# EAGLE board ControlModule (EAGLE 7.4.0)
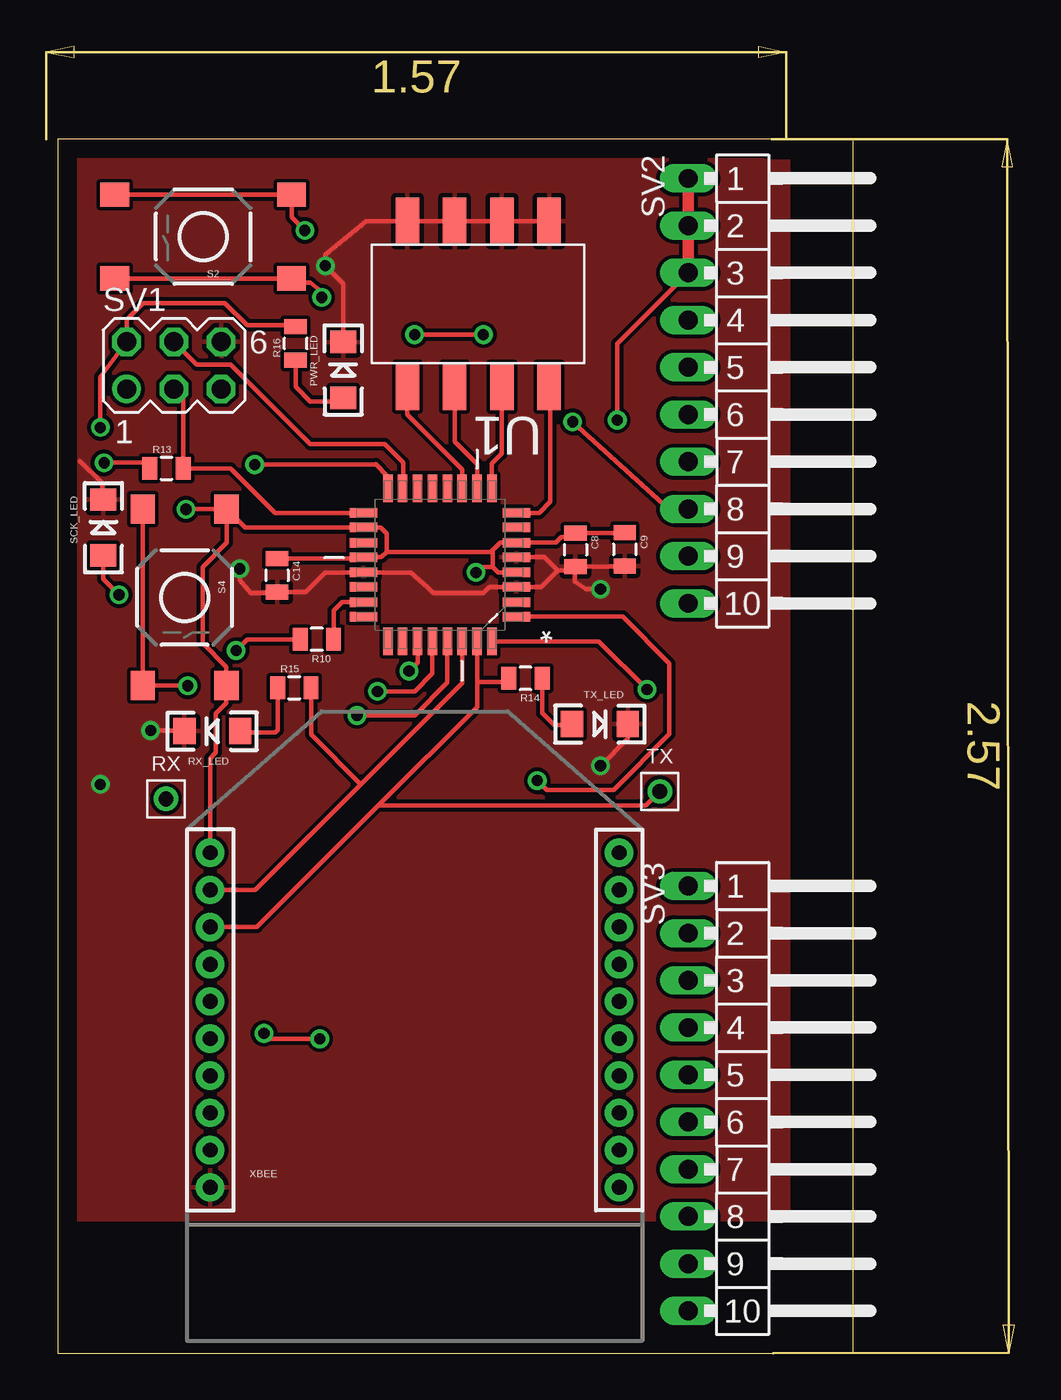
[diagram p0: board, top side]
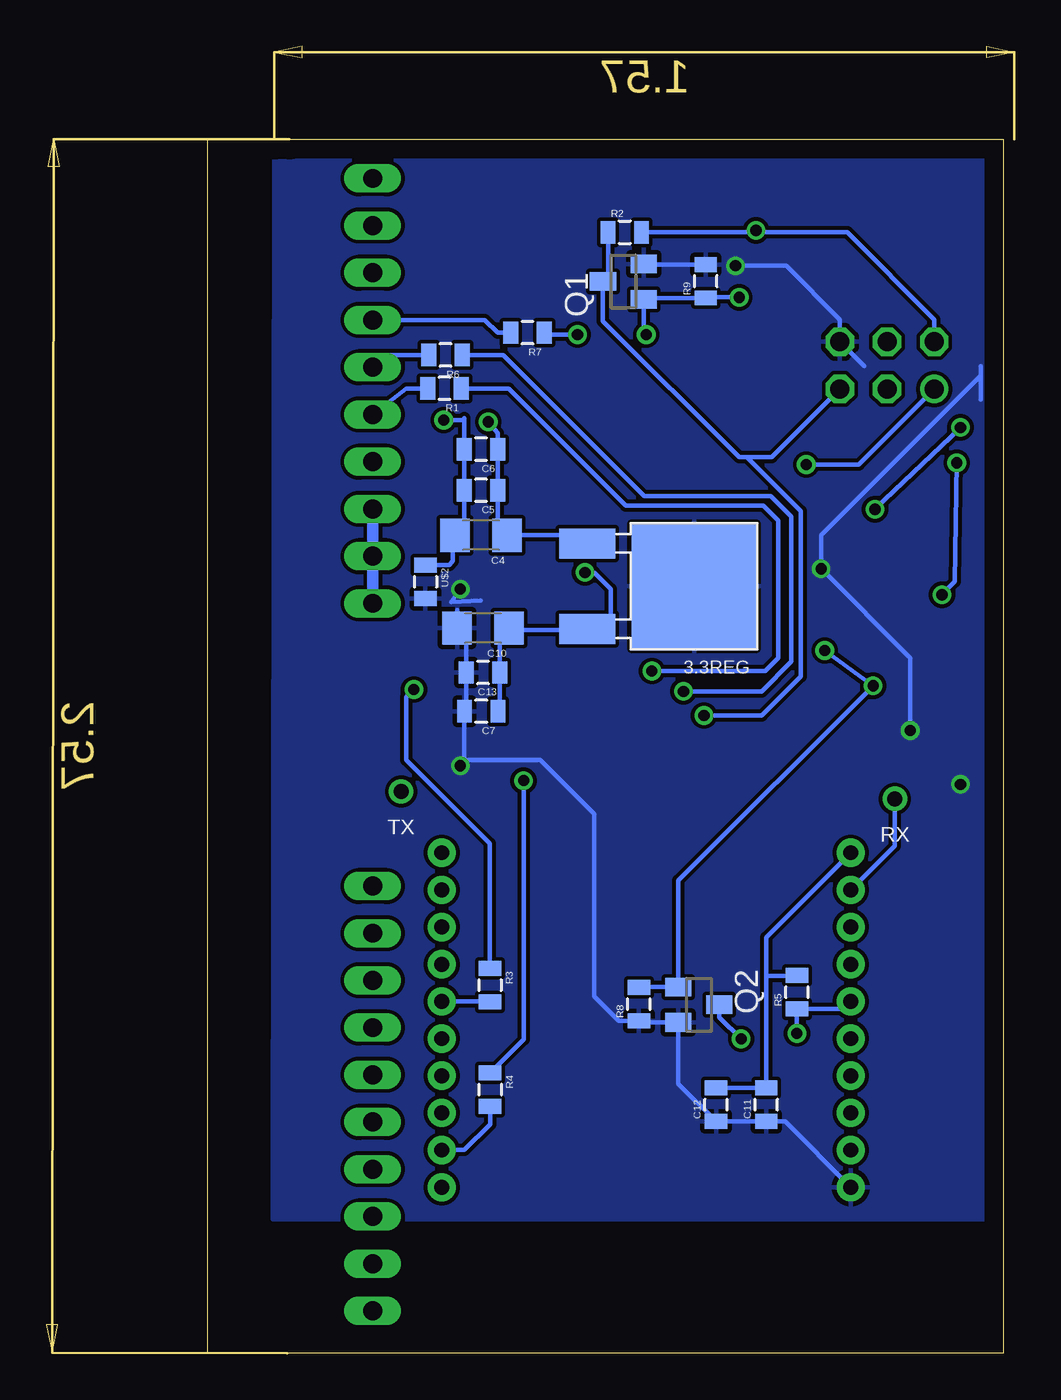
[diagram p1: board, bottom side, seen from below]

Size 42.8 x 65.3 mm. Coordinates in mm from the lower left corner, seen from the top.
Outline: 0,0 42.8,0 42.8,65.3 0,65.3 0,0
Copper layers (1*16): Top 0.035mm / dielectric 1.5mm / Bottom 0.035mm
Design rules "default": minimum track width 10mil, minimum drill 24mil, track to track 8mil, track to pad 8mil, pad to pad 8mil, via to via 8mil, smd to smd 8mil, copper to edge 40mil, drill to drill 8mil, minimum pad ring 10mil, minimum via ring 8mil, stop-mask expansion 4mil, vias tented up to drill 0mil, thermal gap 10mil

## Footprints (pad centres in the part's own frame; a part is rotated, then mirrored left to right if it is on the bottom)
DPAK = smd 6.7 x 6.7: DRAIN 0,0 | smd 3 x 1.6: GATE 5.75,-2.3; SOURCE 5.75,2.3
1206 = smd 1.6 x 1.8: 1 -1.4,0; 2 1.4,0
0805 = smd 0.8 x 1.2: 1 -0.9,0; 2 0.9,0
LED-1206 = smd 1.2 x 1.4: A -1.5,0; C 1.5,0
SOT23 = smd 1 x 1.4: 1 -0.95,-1.1; 2 0.95,-1.1; 3 0,1.1
TESTING_PT = drill 0.8: P$1 0,0
TACTILE-SWITCH-SMD = smd 1.55 x 1.3: 1 -4.75,2.25; 2 4.75,2.25; 3 -4.75,-2.25; 4 4.75,-2.25
MA03-2 = drill 1.016: 1 -2.54,-1.27 | drill 1.016 octagon: 2 -2.54,1.27; 3 0,-1.27; 4 0,1.27; 5 2.54,-1.27; 6 2.54,1.27
MA10-1W = drill 1.016 long: 1 -11.43,0; 2 -8.89,0; 3 -6.35,0; 4 -3.81,0; 5 -1.27,0; 6 1.27,0; 7 3.81,0; 8 6.35,0; 9 8.89,0; 10 11.43,0
QFP80P900X900X120-32N = smd 1.473 x 0.508: 1 -4.115,2.794; 2 -4.115,2.007; 3 -4.115,1.194; 4 -4.115,0.406; 5 -4.115,-0.406; 6 -4.115,-1.194; 7 -4.115,-2.007; 8 -4.115,-2.794; 17 4.115,-2.794; 18 4.115,-2.007; 19 4.115,-1.194; 20 4.115,-0.406; 21 4.115,0.406; 22 4.115,1.194; 23 4.115,2.007; 24 4.115,2.794 | smd 0.508 x 1.473: 9 -2.794,-4.115; 10 -2.007,-4.115; 11 -1.194,-4.115; 12 -0.406,-4.115; 13 0.406,-4.115; 14 1.194,-4.115; 15 2.007,-4.115; 16 2.794,-4.115; 25 2.794,4.115; 26 2.007,4.115; 27 1.194,4.115; 28 0.406,4.115; 29 -0.406,4.115; 30 -1.194,4.115; 31 -2.007,4.115; 32 -2.794,4.115
4-POS-DIP-SMD = smd 1.27 x 2.54: 1 -3.81,4.445; 2 -1.27,4.445; 3 1.27,4.445; 4 3.81,4.445; 5 3.81,-4.445; 6 1.27,-4.445; 7 -1.27,-4.445; 8 -3.81,-4.445
XBEE-1 = drill 0.8 pad 1.524: 1 -11,20; 2 -11,18; 3 -11,16; 4 -11,14; 5 -11,12; 6 -11,10; 7 -11,8; 8 -11,6; 9 -11,4; 10 -11,2; 11 11,2; 12 11,4; 13 11,6; 14 11,8; 15 11,10; 16 11,12; 17 11,14; 18 11,16; 19 11,18; 20 11,20

## Placement (x,y rotation side)
3.3REG  3.3REG1AREG  [DPAK]  16.63,41.26 180 bottom
C4  47uF  [1206]  28.09,44.01 180 bottom
C5  1uF  [0805]  28.09,46.42 180 bottom
C6  0.01uF  [0805]  28.09,48.63 180 bottom
C7  0.01uF  [0805]  28.08,34.53 180 bottom
C8  10uF  [0805]  27.85,43.22 270 top
C9  0.1uF  [0805]  30.5,43.24 270 top
C10  47uF  [1206]  27.98,39.01 180 bottom
C11  0.01uF  [0805]  12.75,13.36 90 bottom
C12  1uF  [0805]  15.45,13.36 90 bottom
C13  1uF  [0805]  27.98,36.62 180 bottom
C14  0.1uF  [0805]  11.8,41.84 270 top
FRAME1  FRAME-LETTER  [CREATIVE_COMMONS]  -78.74,50.8 0 top  (outside the outline)
PWR_LED  [LED-1206]  15.36,52.9 90 top
Q1  BSS123  [SOT23]  20.43,57.65 90 bottom
Q2  BSS123  [SOT23]  16.37,18.74 270 bottom
R1  100  [0805]  30.05,51.9 180 bottom
R2  10k  [0805]  20.36,60.3 0 bottom
R3  0  [0805]  27.61,19.8 270 bottom
R4  0  [0805]  27.6,14.18 270 bottom
R5  10k  [0805]  11.1,19.41 90 bottom
R6  100  [0805]  30,53.7 180 bottom
R7  100  [0805]  25.59,54.9 180 bottom
R8  10k  [0805]  19.6,18.78 90 bottom
R9  10k  [0805]  16,57.67 90 bottom
R10  100  [0805]  13.94,38.4 180 top
R13  1k  [0805]  5.85,47.6 0 top
R14  1k  [0805]  25.16,36.3 180 top
R15  1k  [0805]  12.73,35.8 0 top
R16  1k  [0805]  12.8,54.32 90 top
RX  TEST_PT  [TESTING_PT]  5.83,29.82 0 top
RX_LED  [LED-1206]  8.32,33.46 180 top
S2  TAC_SWITCHSMD  [TACTILE-SWITCH-SMD]  7.83,60.07 180 top
S4  TAC_SWITCHSMD  [TACTILE-SWITCH-SMD]  6.83,40.66 270 top
SCK_LED  [LED-1206]  2.46,44.42 90 top
SV1  ICSP  [MA03-2]  6.25,53.14 0 top
SV2  [MA10-1W]  33.92,51.77 270 top
SV3  [MA10-1W]  33.92,13.7 270 top
TX  TEST_PT  [TESTING_PT]  32.39,30.22 0 top
TX_LED  [LED-1206]  29.16,33.84 0 top
U1  ATMEGA328P-AU  [QFP80P900X900X120-32N]  20.56,42.41 180 top
U$1  4-POS-DIP  [4-POS-DIP-SMD]  22.62,56.45 180 top
U$2  INDUCTOR  [0805]  31.08,41.5 270 bottom
XBEE  XBEE-1B1  [XBEE-1]  19.2,6.92 0 top

## Library data of the parts
3.3REG RX TX U$2 = gen3
C4-C14 = SparkFun-Capacitors
FRAME1 = SparkFun-Aesthetics
PWR_LED RX_LED SCK_LED TX_LED = SparkFun-LED
Q1 Q2 = transistor-small-signal
R1-R10 R13-R16 = SparkFun-Passives
S2 S4 = SparkFun-Retired; PROD_ID: SWCH-08247
SV1-SV3 = con-lstb; OC_FARNELL: unknown; OC_NEWARK: unknown
U1 = Atmel_By_element14_Batch_1-00; MPN: ATMEGA328P-AU; OC_FARNELL: 1715486; OC_NEWARK: 14R4631; PACKAGE: TQFP-32; SUPPLIER: Atmel
U$1 = SparkFun-Electromechanical; PROD_ID: SWCH-12418
XBEE = SparkFun-RF

## Nets
3.3V: 3.3REG.SOURCE C7.1 C8.1 C9.1 C10.1 C11.2 C12.2 C13.1 C14.1 R2.2 R5.2 R16.2 S2.3 S2.4 S4.1 S4.2 SV1.2 U1.4 U1.6 U1.18 U1.20 XBEE.1
12V: 3.3REG.GATE C4.1 C5.1 C6.1 SV2.8 SV2.9 SV2.10
12VGND: C4.2 C5.2 C6.2 SV2.1 SV2.2 SV2.3 U$2.1
BID0: U1.8 U$1.1
BID1: U1.9 U$1.2
BID2: U1.10 U$1.3
BID3: U1.11 U$1.4
CTS: R4.1 U1.1
GND: 3.3REG.DRAIN C7.2 C8.2 C9.2 C10.2 C11.1 C12.1 C13.2 C14.2 PWR_LED.C Q1.2 Q2.2 R8.1 R9.2 RX_LED.C SCK_LED.C SV1.6 TX_LED.C U1.3 U1.5 U1.21 U$1.5 U$1.6 U$1.7 U$1.8 U$2.2 XBEE.10
MISO: SV1.1 U1.16
MOSI: SV1.4 U1.15
N$1: R3.2 XBEE.16
N$2: R13.1 SCK_LED.A
N$3: R4.2 XBEE.12
N$5: R1.1 U1.27
N$7: R10.1 U1.23
N$8: R6.1 U1.28
N$9: R14.1 TX_LED.A
N$10: R15.1 RX_LED.A
N$11: PWR_LED.A R16.1
N$12: Q2.1 R8.2 R10.2 S4.3 S4.4
N$13: Q1.1 R7.1 R9.1 S2.1 S2.2
RST: Q1.3 R2.1 SV1.5 U1.29
RST_CTRL: R7.2 SV2.4
RTS: R3.1 U1.32
RX: R15.2 RX.P$1 U1.30 XBEE.2
SCK: R13.2 SV1.3 U1.17
TWCK: R6.2 SV2.5
TWD: R1.2 SV2.6
TX: R14.2 TX.P$1 U1.31 XBEE.3
XBRST: Q2.3 R5.1 XBEE.5

## Tracks (layer width: path | path; a pad name or v marks a point on that pad's centre or on a via)
3.3V  (via drill 0.6)
  Top 0.254: S4.1 10.08,44.42 U1.18 17.38,44.42 17.7,44.1 17.7,43.1 | C9.1 30.48,44.12 C8.1 27.83,43.9 27.1,43.9 26.8,43.6 U1.6 23.8,43.6 23.4,43.2 | 23.4,43.2 23.4,42.3 | 23.4,42.3 23.7,42 U1.4 | C14.1 16.37,42.74 U1.20 17.42,42.82 17.7,43.1 | 23.4,43.2 23.3,43.1 17.7,43.1 | S2.4 S2.3 12.58,61.12 v13.3,60.4 | v22.5,42 22.8,42.3 23.4,42.3 | S4.1 7.67,45.4 v6.9,45.4 | S4.1 9.1,45.39 9.1,43.6 7.8,42.3 7.8,38.2 9.08,36.92 S4.2 9.08,34.98 8.5,34.4 8.5,32.3 8.2,32 XBEE.1 | R16.2 12.72,55.3 10.2,55.3 9,56.5 4.6,56.5 3.71,55.61 SV1.2 2.3,52.5 v2.3,49.8
  Bottom 0.254: C12.2 C11.2 12.75,20.3 | XBEE.1 12.75,22.37 12.75,20.3 | v13.3,60.4 13.4,60.3 | 13.4,60.3 R2.2 | C7.1 27.08,34.53 C13.1 27.08,38.9 | 27.08,38.9 27.08,39.01 C10.1 | 13.4,60.3 8.4,60.3 3.71,55.61 SV1.2 | v6.9,45.4 v2.3,49.8 | 3.3REG.SOURCE 22.44,38.9 27.08,38.9 | 3.3REG.SOURCE 22.3,39.04 | v22.5,42 22,42 21.1,41.1 21.1,39.2 21.4,38.9 22.32,38.9 3.3REG.SOURCE | R5.2 12.75,20.3
12V  (via drill 0.6)
  Top 0.254: v27.7,50.1 32.88,45.42 SV2.8
  Bottom 0.254: 3.3REG.GATE 22.38,44.01 C4.1 27.19,44.01 C5.1 C6.1 27.19,49.49 v27.7,50.1
  Bottom 0.61: SV2.8 SV2.9 SV2.10
12VGND  (via drill 0.6)
  Top 0.254: SV2.3 30.1,54.3 v30.1,50.2
  Top 0.61: SV2.1 SV2.2 SV2.3
  Bottom 0.254: 28.99,50.31 28.99,50.2 | 28.99,50.2 C6.2 C5.2 28.99,44.51 C4.2 29.6,43.9 29.6,42.6 29.8,42.4 U$2.1 | v30.1,50.2 28.99,50.2
BID0
  Top 0.254: U1.8 25.9,45.2 26.5,45.8 26.5,51.94 U$1.1
BID1
  Top 0.254: U1.9 23.35,47.85 23.89,48.39 U$1.2
BID2
  Top 0.254: U1.10 22.57,47.83 21.35,49.05 U$1.3
BID3
  Top 0.254: U1.11 21.75,47.55 18.81,50.49 U$1.4
CTS  (via drill 0.6)
  Top 0.254: U1.1 30.38,39.62 32.9,37.1 32.9,33.3 29.9,30.3 26.3,30.3 v25.8,30.8
  Bottom 0.254: R4.1 25.8,16.88 v25.8,30.8
GND  (via drill 0.6)
  Top 0.254: U1.5 26.18,42.82 26.9,42.1 | 26.9,42.1 27.83,42.1 C8.2 | C8.2 30.48,42.32 C9.2 | U1.3 26.02,41.22 26.9,42.1 | U$1.8 U$1.7 U$1.6 U$1.5 17.7,60.9 16.6,60.9 14.4,59.1 v14.4,58.5 15.36,57.54 PWR_LED.C | 24.66,41.2 U1.3 | v29.2,31.6 30.66,33.06 TX_LED.C | U1.3 23.22,41.22 22.9,40.9 20.2,40.9 19.9,41.2 19,42 U1.21 14.4,42 13.34,40.94 C14.2 11.76,40.9 10.4,40.9 9.8,41.6 v9.8,42.2 | v29.2,41.1 28.4,41.1 27.8,41.5 27.8,42.07 C8.2 | RX_LED.C 6.78,33.5 v5,33.5 | 1.2,48 2.4,46.8 2.4,45.98 SCK_LED.C
  Bottom 0.254: XBEE.10 11.74,12.46 C11.1 C12.1 17.47,14.48 Q2.2 19.51,17.79 R8.1 20.68,17.88 22,19.2 22,29 24.9,31.9 28.9,31.9 v29.2,31.6 28.98,31.82 C7.2 28.88,34.53 C13.2 28.88,39.01 C10.2 29.38,39.98 | Q1.2 19.3,58.57 R9.2 15.93,58.5 | v14.4,58.5 11.68,58.5 8.79,55.61 SV1.6 7.48,53.1 | 1.2,51.3 1.2,52.6 | 1.2,52.6 1.2,53.1 | 28.1,40.5 29.7,40.4 v29.2,41.1 | v5,33.5 5,37.4 v9.8,42.2 9.8,44 1.2,52.6
  other vias: 2.3,30.6
  pour Top: 0,7.2 39.3,7.2 39.3,65.3 -0.7,65.3
  pour Bottom: 0,7.2 39.3,7.2 39.2,65.3 -0.7,65.2
MISO  (via drill 0.6)
  Top 0.254: U1.16 17.77,47.16 17.11,47.82 17.09,47.8 v10.6,47.8
  Bottom 0.254: SV1.1 7.78,47.8 v10.6,47.8
MOSI
  Top 0.254: U1.15 18.6,46.57 18.6,47.9 17.6,48.9 13.6,48.9 9.32,53.18 7.48,53.18 SV1.4
N$1
  Bottom 0.254: R3.2 27.63,18.92 XBEE.16
N$2  (via drill 0.6)
  Top 0.254: R13.1 4.8,47.9 v2.5,47.9 | v3.3,40.8 2.46,41.64 SCK_LED.A
  Bottom 0.254: v2.5,47.9 2.6,41.5 v3.3,40.8
N$3
  Bottom 0.254: R4.2 27.6,12.3 28.98,10.92 XBEE.12
N$5  (via drill 0.6)
  Top 0.254: U1.27 19.37,37.17 v18.9,36.7
  Bottom 0.254: v18.9,36.7 12.8,36.7 12.1,37.4 12.1,44.8 12.9,45.6 20.3,45.6 26.6,51.9 R1.1 29.05,51.4
N$7
  Top 0.254: R10.1 14.84,39.94 15.3,40.4 U1.23
N$8  (via drill 0.6)
  Top 0.254: U1.28 20.15,36.55 19.2,35.6 v17.2,35.6
  Bottom 0.254: v17.2,35.6 13,35.6 11.4,37.2 11.4,45 12.5,46.1 19.3,46.1 26.9,53.7 R6.1
N$9
  Top 0.254: R14.1 26.06,34.44 26.7,33.8 27.62,33.8 TX_LED.A
N$10
  Top 0.254: 9.58,33.5 RX_LED.A 9.43,33.77 9.8,33.4 11.7,33.4 11.83,33.53 R15.1
N$11
  Top 0.254: R16.1 12.8,52 13.6,51.2 15.16,51.2 PWR_LED.A
N$12  (via drill 0.6)
  Top 0.254: S4.3 S4.4 v6.99,35.91 v7,35.9 | v9.6,37.8 10.2,38.4 R10.2
  Bottom 0.254: v9.6,37.8 v7,35.9 17.47,25.43 Q2.1 R8.2
N$13  (via drill 0.6)
  Top 0.254: S2.2 S2.1 12.8,57.6 13,57.6 | v22.9,54.8 v19.2,54.8 | 12.9,58.1 12.9,57.7 13,57.6 | 13,57.6 13.6,57.6 14.2,57.1 v14.2,56.8
  Bottom 0.254: R7.1 24.59,54.8 v22.9,54.8 | v19.2,54.8 19.33,54.93 Q1.1 19.26,56.77 R9.1 15.97,56.8 v14.2,56.8
RST  (via drill 0.6)
  Top 0.254: U1.29 20.97,36.07 19.2,34.3 v16.1,34.3
  Bottom 0.254: R2.1 21.26,57.92 Q1.3 21.53,55.53 14.2,48.2 13.8,48.2 | v16.1,34.3 13,34.3 10.9,36.4 10.9,45.3 13.8,48.2 | SV1.5 12.46,48.2 13.8,48.2
RST_CTRL
  Bottom 0.254: SV2.4 27.88,55.58 27.2,54.9 R7.2
RTS  (via drill 0.6)
  Top 0.254: U1.32 29.11,38.3 v31.7,35.7
  Bottom 0.254: R3.1 27.61,27.41 32.1,31.9 32.1,35.3 v31.7,35.7
RX
  Top 0.254: U1.30 21.75,36.05 16.3,30.6 | 16.3,30.6 10.62,24.92 XBEE.2 | R15.2 13.63,33.27 16.3,30.6
  Bottom 0.254: XBEE.2 5.83,27.29 RX.P$1
SCK
  Top 0.254: U1.17 11.72,45.2 9.32,47.6 R13.2 6.75,51.37 SV1.3
TWCK
  Bottom 0.254: R6.2 33.26,53.7 SV2.5
TWD
  Bottom 0.254: R1.2 32.12,51.9 SV2.6
TX
  Top 0.254: U1.31 22.57,36.1 | 22.57,36.1 22.57,34.77 17.25,29.45 | 17.25,29.45 10.72,22.92 XBEE.3 | R14.2 24.06,36.1 22.57,36.1 | TX.P$1 31.62,29.45 17.25,29.45
XBRST  (via drill 0.6)
  Top 0.254: v11.1,17.2 11.4,16.9 v14.1,16.9
  Bottom 0.254: XBEE.5 8.61,18.51 R5.1 | 11.33,18.74 R5.1 | R5.1 v11.1,17.2 | v14.1,16.9 15.27,18.07 Q2.3